# Altium PCB PCB1.PcbDoc
Units mil, origin at the board's own origin, x right, y up, seen from the top; angles counter-clockwise.
Board outline 2600 x 2600 mil, 2 copper layers (Top Layer, Bottom Layer); 21 components, 109 nets, 295 pads, 0 vias.
Unrouted connection lines stored in the file: 152.
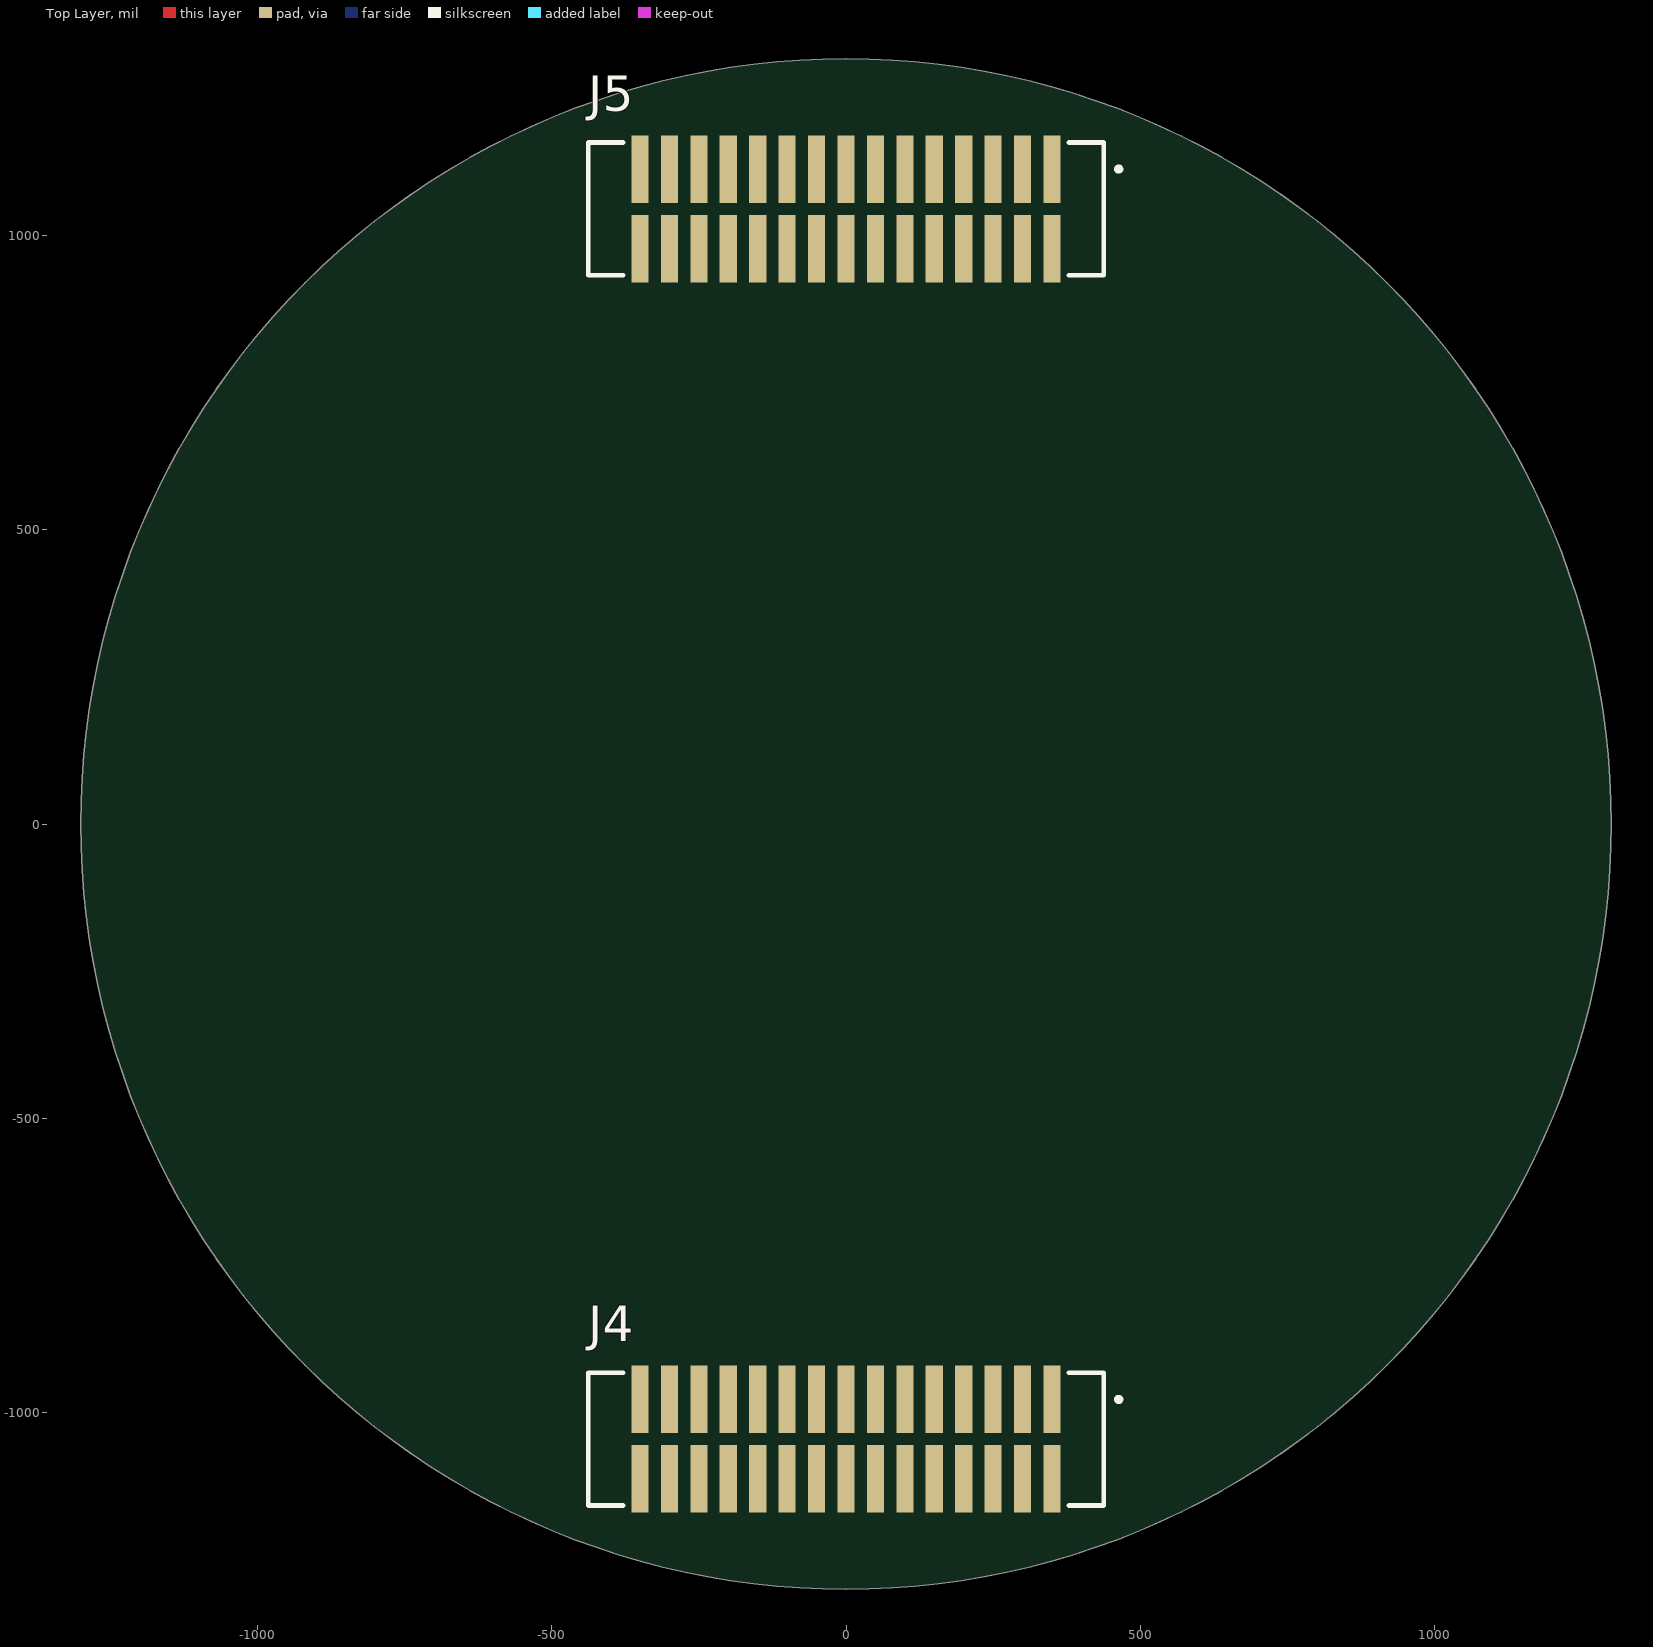
[diagram p0: Top Layer view]
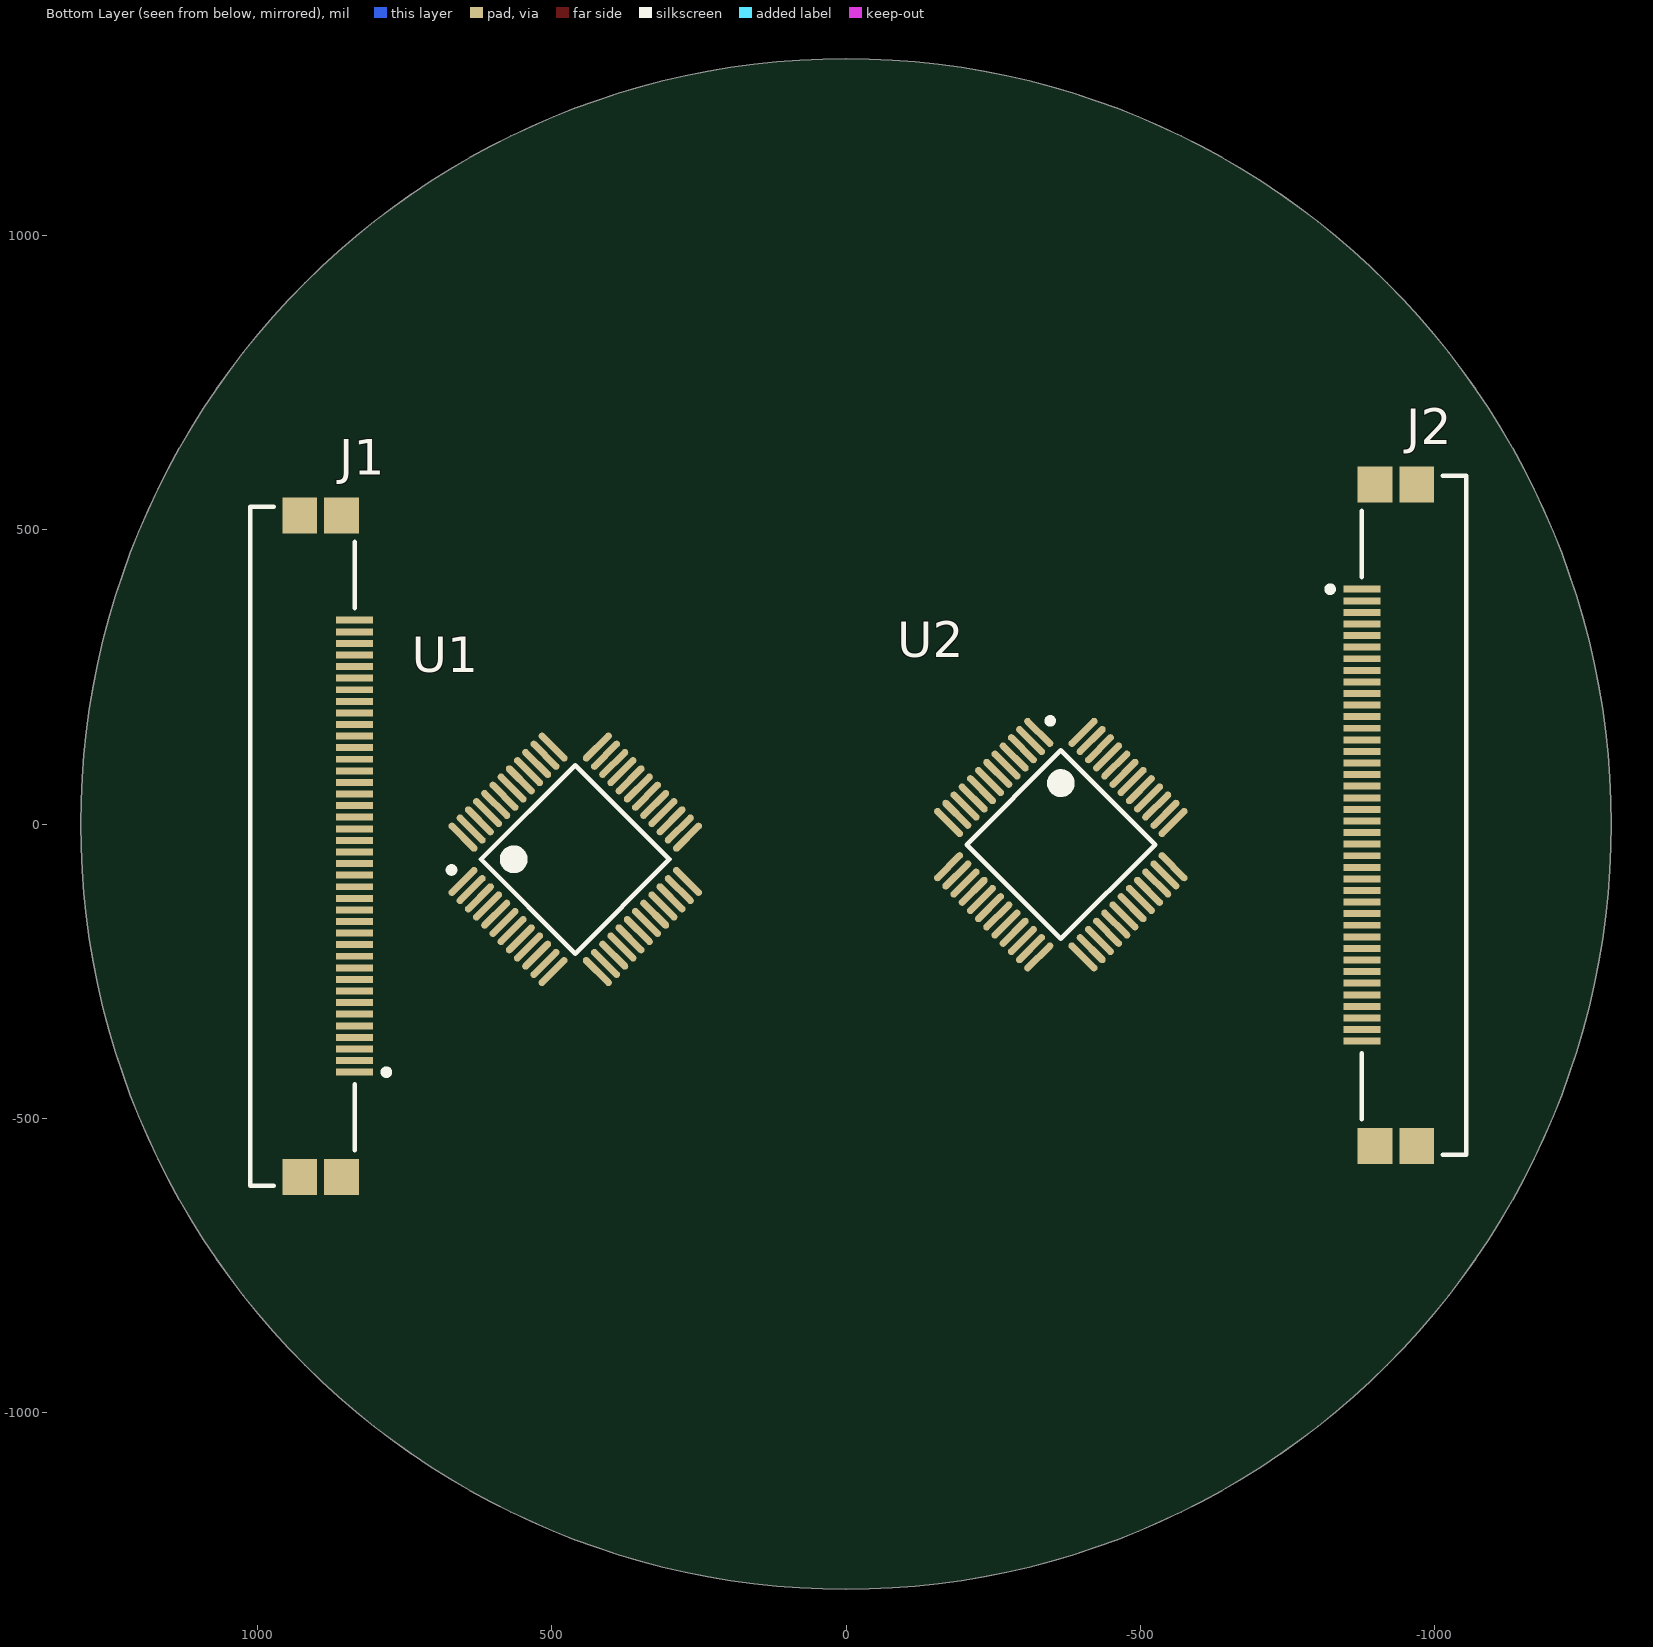
[diagram p1: Bottom Layer view, seen from below]

## Layer stack, top to bottom
Top Solder: solder mask 0.4, Solder Resist, Dk 3.5
Top Layer: signal copper 1.4
Dielectric 1: dielectric 12.6, FR-4, Dk 4.8
Bottom Layer: signal copper 1.4
Bottom Solder: solder mask 0.4, Solder Resist, Dk 3.5

## Board outline
-1300,0 ccw(c0,0) 0,-1300 ccw(c0,0) 1300,0 ccw(c0,0) 0,1300 ccw(c0,0)

## Design rules (kind name [scope] priority, off if disabled: settings)
Clearance [All] p1: gap=8 ignorepadtopadclearanceinfootprint=FALSE except(6: Arc-SMDPad Track-SMDPad SMDPad-SMDPad; 12: Arc-Via Track-Via)
HoleSize [All] p1: absolutevalues=TRUE maxlimit=100 minlimit=14 maxpercent=80.000 minpercent=20.000
PolygonConnect [All] p1: connectstyle=Relief reliefconductorwidth=10 reliefentries=4 polygonreliefangle="90 Angle" airgapwidth=10
RoutingVias [All] p1: holewidth=14 width=28 viastyle="Through Hole" minholewidth=14 minwidth=28 maxholewidth=14 maxwidth=28
SolderMaskExpansion [All] p1: expansion=4 istentingtop=FALSE
Width [All] p1: maxlimit=30 minlimit=10 preferedwidth=10
29 further rules are at their usual default settings.

## Components (designator, comment, footprint, x,y, rotation, side; value= is the part's Value field where it differs from the comment)
C1 "330nF" FP-CC0805-0_85-MFG 4445,5125 r0 top value="330 nF"
C2 "33nF" CAPC2013X95X45NL10T25 4260,5135 r0 top
C3 "3.3nF" FP-C0805C-DN-MFG 4085,5125 r0 top value="3,300 pF"
C4 "330pF" FP-C0805C-DN-MFG 3915,5125 r0 top value="330 pF"
C5 "100 nF" FP-C0805C-DN-MFG 3575,5125 r0 top value="0.10 μF"
C6 "100 nF" FP-C0805C-DN-MFG 3035,5125 r0 top value="0.10 μF"
C7 "100 nF" FP-C0805C-DN-MFG 2865,5125 r0 top value="0.10 μF"
J1 "200485-0540" FP-200485-0540-MFG 923.39,-37.68 r270 bottom
J2 "200485-0540" FP-200485-0540-MFG -965,15 r90 bottom
J3 "5600200620" FP-5600200620-MFG 4820,5010 r90 top
J4 "TFM-115-02-L-D" SAMTEC_TFM-115-02-L-D 0,-1045 r180 top
J5 "TFM-115-02-L-D" SAMTEC_TFM-115-02-L-D 0,1045 r180 top
P1 "61300311021" 61300311021 1735,5020 r0 top
P2 "61300211021" 61300211021 2065,5020 r0 top
P3 "61300211021" 61300211021 2345,5020 r0 top
R1 "100" RESC2013X50X30LL20T20 5535,5140 r0 top
R2 "1k" RESC2013X55X40LL15T20 3740,5140 r0 top
S1 "SSSS212400" SSSS212400 2670,4675 r90 top
U1 "ADG732BSUZ-REEL" ADI-SU-48_N 460,-60 r135 bottom
U2 "ADG732BSUZ-REEL" ADI-SU-48_N -365,-35 r225 bottom
U3 "OPA2388IDR" FP-D0008A-IPC_B 3315,5060 r0 top

## Footprints (in the part's own frame and the unit in brackets; to place one, negate y for a bottom-side part, rotate by r counter-clockwise, add the part's x,y. Pads: shape width x height; smd on the part's side, far side on the other; paste and mask are expansions set on the pad)
61300211021 [mm] "Pin Header, pitch 2.54 mm, THT, Angled, single row, 2p"
  rect 1.65x1.65 hole 1.1: 1(1.27,2.77)
  round 1.65 hole 1.1: 2(-1.27,2.77)
  silkscreen extent -2.69,-7.27 2.69,1.35, body extent -2.54,-7.27 2.54,3.09, height 2.58
61300311021 [mm] "Pin Header, pitch 2.54 mm, THT, Angled, single row, 3p"
  rect 1.65x1.65 hole 1.1: 1(2.54,2.77)
  round 1.65 hole 1.1: 2(0,2.77) 3(-2.54,2.77)
  silkscreen extent -3.96,-7.27 3.96,1.35, body extent -3.81,-7.27 3.81,3.09, height 2.58
ADI-SU-48_N [mm] "QFP, 48-Leads, Body 7x7mm, Pitch 0.5mm, IPC Medium Density"
  oval 1.65x0.3 smd: 1(-4.1,2.75) 2(-4.1,2.25) 3(-4.1,1.75) 4(-4.1,1.25) 5(-4.1,0.75) 6(-4.1,0.25) 7(-4.1,-0.25) 8(-4.1,-0.75) 9(-4.1,-1.25) 10(-4.1,-1.75) 11(-4.1,-2.25) 12(-4.1,-2.75) 25(4.1,-2.75) 26(4.1,-2.25) 27(4.1,-1.75) 28(4.1,-1.25) 29(4.1,-0.75) 30(4.1,-0.25) 31(4.1,0.25) 32(4.1,0.75) 33(4.1,1.25) 34(4.1,1.75) 35(4.1,2.25) 36(4.1,2.75)
  oval 0.3x1.65 smd: 13(-2.75,-4.1) 14(-2.25,-4.1) 15(-1.75,-4.1) 16(-1.25,-4.1) 17(-0.75,-4.1) 18(-0.25,-4.1) 19(0.25,-4.1) 20(0.75,-4.1) 21(1.25,-4.1) 22(1.75,-4.1) 23(2.25,-4.1) 24(2.75,-4.1) 37(2.75,4.1) 38(2.25,4.1) 39(1.75,4.1) 40(1.25,4.1) 41(0.75,4.1) 42(0.25,4.1) 43(-0.25,4.1) 44(-0.75,4.1) 45(-1.25,4.1) 46(-1.75,4.1) 47(-2.25,4.1) 48(-2.75,4.1)
  silkscreen extent -4.22,-2.88 2.88,3.57, body extent -3.5,-3.5 3.5,3.5, height 1.2
CAPC2013X95X45NL10T25 [mm] "Chip Capacitor, 2-Leads, Body 2.00x1.25mm, IPC Medium Density"
  rect 1.2x1.4 smd: 1(-0.85,0) 2(0.85,0)
  body extent -1.05,-0.67 1.05,0.67, height 0.95
FP-200485-0540-MFG [mm]
  rect 0.3x1.6 smd paste-1000 mask+0: 1(9.75,2.245) 2(9.25,2.245) 3(8.75,2.245) 4(8.25,2.245) 5(7.75,2.245) 6(7.25,2.245) 7(6.75,2.245) 8(6.25,2.245) 9(5.75,2.245) 10(5.25,2.245) 11(4.75,2.245) 12(4.25,2.245) 13(3.75,2.245) 14(3.25,2.245) 15(2.75,2.245) 16(2.25,2.245) 17(1.75,2.245) 18(1.25,2.245) 19(0.75,2.245) 20(0.25,2.245) 21(-0.25,2.245) 22(-0.75,2.245) 23(-1.25,2.245) 24(-1.75,2.245) 25(-2.25,2.245) 26(-2.75,2.245) 27(-3.25,2.245) 28(-3.75,2.245) 29(-4.25,2.245) 30(-4.75,2.245) 31(-5.25,2.245) 32(-5.75,2.245) 33(-6.25,2.245) 34(-6.75,2.245) 35(-7.25,2.245) 36(-7.75,2.245) 37(-8.25,2.245) 38(-8.75,2.245) 39(-9.25,2.245) 40(-9.75,2.245)
  rect 1.55x1.5 smd paste+0 mask+0: 41(-14.275,1.685) 42(14.275,1.685) 43(-14.275,-0.115) 44(14.275,-0.115)
  silkscreen extent -14.65,-2.25 14.65,3.74, body extent -14.75,-2.2 14.74,2.8, height 5.7
FP-5600200620-MFG [mm]
  rect 1.2x2.2 smd paste+0 mask+0: 1(5,4.68) 2(3,4.68) 3(1,4.68) 4(-1,4.68) 5(-3,4.68) 6(-5,4.68)
  rect 2x4.2 smd paste+0 mask+0: 7(-8.6,-0.9) 8(8.6,-0.9)
  silkscreen extent -9.43,-4 9.43,6.63, body extent -9.7,-4.1 9.7,5.88, height 0.25
FP-C0805C-DN-MFG [mm]
  rect 0.95x1.35 smd paste+0 mask+0: 1(-0.75,0) 2(0.75,0)
  silkscreen extent -1.1,-1.07 1.1,1.07, body extent -1.4,-0.85 1.4,0.85, height 0.25
FP-CC0805-0_85-MFG [mm]
  rect 0.95x1.4 smd paste+0 mask+0: 1(-0.925,0) 2(0.925,0)
  silkscreen extent -0.08,-0.72 0.08,0.72, body extent -1.6,-1.05 1.6,1.05, height 0.25
FP-D0008A-IPC_B [mil]
  rect 85.4x22.92 smd paste+0 mask+0: 1(-93.06,75)
  rrect100% 85.4x22.92 smd paste+0 mask+0: 2(-93.06,25) 3(-93.06,-25) 4(-93.06,-75) 5(93.06,-75) 6(93.06,-25) 7(93.06,25) 8(93.06,75)
  silkscreen extent -162,-97 31,97, body extent -146,-106 146,106, height 10
RESC2013X50X30LL20T20 [mm] "Chip Resistor, 2-Leads, Body 2.00x1.25mm, IPC High Density"
  rect 0.85x1.35 smd: 1(-0.825,0) 2(0.825,0)
  silkscreen extent -0.1,-0.58 0.1,0.58, body extent -1.1,-0.72 1.1,0.72, height 0.5
RESC2013X55X40LL15T20 [mm] "Chip Resistor, 2-Leads, Body 2.00x1.25mm, IPC High Density"
  rect 0.9x1.3 smd: 1(-0.775,0) 2(0.775,0)
  body extent -1.07,-0.7 1.07,0.7, height 0.55
SAMTEC_TFM-115-02-L-D [mm]
  rect 0.74x2.92 smd: 01(-8.89,-1.715) 02(-8.89,1.715) 03(-7.62,-1.715) 04(-7.62,1.715) 05(-6.35,-1.715) 06(-6.35,1.715) 07(-5.08,-1.715) 08(-5.08,1.715) 09(-3.81,-1.715) 10(-3.81,1.715) 11(-2.54,-1.715) 12(-2.54,1.715) 13(-1.27,-1.715) 14(-1.27,1.715) 15(0,-1.715) 16(0,1.715) 17(1.27,-1.715) 18(1.27,1.715) 19(2.54,-1.715) 20(2.54,1.715) 21(3.81,-1.715) 22(3.81,1.715) 23(5.08,-1.715) 24(5.08,1.715) 25(6.35,-1.715) 26(6.35,1.715) 27(7.62,-1.715) 28(7.62,1.715) 29(8.89,-1.715) 30(8.89,1.715)
  silkscreen extent -11.87,-2.86 11.11,2.86, body extent -11.11,-3.05 11.11,2.92, height 5.71
SSSS212400 [mm]
  round 1.4 hole 0.9: 1(0,0) 2(2,0) 3(6,0) 4(8,0) 5(10,0) 6(0,3.3) 7(2,3.3) 8(6,3.3) 9(8,3.3) 10(10,3.3)
  silkscreen extent -2.5,-2.1 12.5,3.4, body extent -2.5,-2.1 12.5,3.65, height 3.6

## Part data
C1: library part CMP-03422-000882-1, "Surface Mount Ceramic Multilayer Capacitor 0.33uF 10% X7R 16V 0805 Blister T/R", Capacitance="330 nF", Manufacturer=Yageo, Manufacturer Part Number=CC0805KKX7R7BB334, Package=CC0805-0.85, Temperature="-30°C to +85°C", Temperature Characteristic=X7R, Temperature Range High=+85°C, Temperature Range Low=-30°C, Tolerance=0.1, Voltage Rating="16 V", Automotive=No, Category=Cap, ComponentLink2Description=Datasheet, ComponentLink2URL=http://www.yageo.com/documents/recent/UPY-GPHC_Y5V_6.3V-to-50V_8.pdf, Device Class L1="Passive Components", Device Class L2=Capacitors, Device Class L3="Ceramic Capacitors", Digikey Description="Surface Mount Ceramic Multilayer Capacitor 0.33uF 10% X7R 16V 0805 Blister T/R", Footprint Url=http://www.yageo.com/exep/pages/download/literatures/UPY-C_GEN_24.pdf, Height=0.95mm, Ipc Land Pattern Name=CAPC200125X85, Lead Free=Yes, Material=Ceramic, Mouser Description="Multilayer Ceramic Capacitors MLCC - SMD/SMT 330nF 16V X7R 10%", Octopart=https://octopart.com/cc0805kkx7r7bb334-yageo-42334127, RoHS=TRUE
C2: library part CMP-1036-04169-2, Manufacturer=Murata, Part Number=GRM219R71H333KA01D
C3: library part CMP-2007-00373-2, "CAP CER 3300PF 50V X7R 0805", Capacitance="3,300 pF", Manufacturer=KEMET, Manufacturer Part Number=C0805C332K5RACTU, Package=C0805C-DN, Temperature="-55°C to +125°C", Temperature Characteristic=X7R, Temperature Coefficient=30ppm/°C, Temperature Range High=+125°C, Temperature Range Low=-55°C, Tolerance=0.1, Voltage Rating="50 V", Automotive=No, Category=Cap, ComponentLink2Description=Datasheet, ComponentLink2URL=https://content.kemet.com/datasheets/KEM_C1003_C0G_SMD.pdf, Device Class L1="Passive Components", Device Class L2=Capacitors, Device Class L3="Ceramic Capacitors", Digikey Description="CAP CER 3300PF 50V X7R 0805", Height=0.88mm, Ipc Land Pattern Name=CAPC200125X78, Lead Free=Yes, Material=Ceramic, Mouser Description="Multilayer Ceramic Capacitors MLCC - SMD/SMT 50volts 3300pF X7R 10%", Octopart=https://octopart.com/c0805c332k5ractu-kemet-90782, RoHS=TRUE
C4: library part CMP-2007-00598-2, "CAP CER 330PF 50V C0G/NP0 0805", Capacitance="330 pF", Manufacturer=KEMET, Manufacturer Part Number=C0805C331J5GACTU, Package=C0805C-DN, Temperature="-55°C to +125°C", Temperature Characteristic=C0G, Temperature Coefficient=30ppm/°C, Temperature Range High=+125°C, Temperature Range Low=-55°C, Tolerance=0.05, Voltage Rating="50 V", Automotive=No, Category=Cap, ComponentLink2Description=Datasheet, ComponentLink2URL=https://content.kemet.com/datasheets/KEM_C1003_C0G_SMD.pdf, Device Class L1="Passive Components", Device Class L2=Capacitors, Device Class L3="Ceramic Capacitors", Digikey Description="CAP CER 330PF 50V C0G/NP0 0805", Height=0.88mm, Ipc Land Pattern Name=CAPC200125X78, Lead Free=Yes, Material=Ceramic, Mouser Description="Ceramic Capacitor 330Pf 50V, C0G, 5%, 0805, Full Reel", Octopart=https://octopart.com/c0805c331j5gactu-kemet-85885, RoHS=TRUE
C5 C6 C7: library part CMP-2007-00279-2, "CAP CER 0.1UF 50V X7R 0805", Capacitance="0.10 μF", Manufacturer=KEMET, Manufacturer Part Number=C0805C104K5RACTU, Package=C0805C-DN, Temperature="-55°C to +125°C", Temperature Characteristic=X7R, Temperature Coefficient=30ppm/°C, Temperature Range High=+125°C, Temperature Range Low=-55°C, Tolerance=0.1, Voltage Rating="50 V", Automotive=No, Category=Cap, ComponentLink2Description=Datasheet, ComponentLink2URL=https://content.kemet.com/datasheets/KEM_C1003_C0G_SMD.pdf, Device Class L1="Passive Components", Device Class L2=Capacitors, Device Class L3="Ceramic Capacitors", Digikey Description="CAP CER 0.1UF 50V X7R 0805", Height=0.88mm, Ipc Land Pattern Name=CAPC200125X78, Lead Free=Yes, Material=Ceramic, Mouser Description="Cap Ceramic 0.1uF 50V X7R 10% SMD 2.0 x 1.2 mm 125 C Paper T/R", Octopart=https://octopart.com/c0805c104k5ractu-kemet-143926, RoHS=TRUE
J1 J2: library part CMP-04775-000016-1, "0.5ONE-TOUCH ST 40P"
J3: library part CMP-04776-000066-1, "CONN HEADER SMD 6POS 2MM", Current Rating=3A, Manufacturer=Molex, Temperature="-40°C to +125°C", Temperature Range High=+125°C, Temperature Range Low=-40°C, Voltage Rating=125V, Automotive=No, Category=Conn, ComponentLink2Description=Datasheet, ComponentLink2URL=https://www.molex.com/webdocs/datasheets/pdf/en-us/5600200320_PCB_HEADERS.pdf, Conn Gender=Male, Conn Orientation=Vertical, Contact Material=Tin,Nickel, Device Class L1=Connectors, Device Class L2="Headers and Wire Housings", Device Class L3=unset, Digikey Description="CONN HEADER SMD 6POS 2MM", Footprint Url=https://www.molex.com/pdm_docs/sd/5600200320_sd.pdf, Height=8.2mm, Lead Free=Yes, Manufacturer Part Number=5600200620, Number of Contacts=6, Number of Rows=1, Octopart=https://octopart.com/5600200620-molex-51767481, Package=5600200620, Pitch=2mm, RoHS=TRUE
J4 J5: Package=None, Availability=Unavailable, MF="Samtec Inc.", MP=TFM-115-02-L-D, Price=None, System=Connector
P1: library part CMP-1502-01061-1, "THT Angled Pin Header WR-PHD, Pitch 2.54 mm, Single Row, 3 pins", Contact Resistance=20mOhm, Manufacturer="Wurth Elektronik", Operating Temperature=-40to105degC, Rated Current=3A, Withstanding Voltage=500VAC, Working Voltage=250VAC, Datasheet URL=https://katalog.we-online.de/em/datasheet/6130xx11021.pdf, Gender=Male, Manufacturer URL=http://www.we-online.de, Mounting Technology=THT, Orientation=Angled, Package Reference=61300311021, Packaging=Bag, Part Number=61300311021, Pin Number=3, Pitch=2.54mm, Publisher=WurthElektronik, Row Number=Single
P2 P3: library part CMP-1502-01059-1, "THT Angled Pin Header WR-PHD, Pitch 2.54 mm, Single Row, 2 pins", Contact Resistance=20mOhm, Manufacturer="Wurth Elektronik", Operating Temperature=-40to105degC, Rated Current=3A, Withstanding Voltage=500VAC, Working Voltage=250VAC, Datasheet URL=https://katalog.we-online.de/em/datasheet/6130xx11021.pdf, Gender=Male, Manufacturer URL=http://www.we-online.de, Mounting Technology=THT, Orientation=Angled, Package Reference=61300211021, Packaging=Bag, Part Number=61300211021, Pin Number=2, Pitch=2.54mm, Publisher=WurthElektronik, Row Number=Single
R1: library part CMP-2001-04901-1, Manufacturer="Vishay Dale", Part Number=CRCW0805100RFKEA
R2: library part CMP-2001-04738-1, "TNPW08051K00BEEN", Manufacturer="Vishay Dale", Part Number=TNPW08051K00BEEN
S1: "Switch", Manufacturer_Name="ALPS Electric", Mouser Part Number=688-SSSS212400, Datasheet Link=https://www.alps.com/prod/info/E/HTML/Switch/Slide/SSSS2/SSSS224100.html, Height=3.5mm, Manufacturer_Part_Number=SSSS212400, Mouser Price/Stock=https://www.mouser.com/Search/Refine.aspx?Keyword=688-SSSS212400
U1 U2: library part CMP-0798-00236-1, "1.8 to 5.5 V / +/-2.5 V, 4 Ohm, 32-Channel Analog Multiplexer, -40 to 85 degC, 48-pin QFP (SU-48), Reel", Manufacturer="Analog Devices", Bandwidth (Hz)=18M, Code_JEDEC=MS-026ABC, ComponentLink1Description="Manufacturer URL", ComponentLink1URL=http://www.analog.com/en/index.html, ComponentLink2Description=Datasheet, ComponentLink2URL=http://www.analog.com/static/imported-files/data_sheets/ADG726_732.pdf, ComponentLink3Description="Package Specification", ComponentLink3URL=http://www.analog.com/static/imported-files/packages/470644706845302410119987SU48_7x7.pdf, DatasheetVersion="Rev. 0", Max Analog Signal Range="Vss to Vdd", Mounting Technology="Surface Mount", PackageDescription="48-Pin Thin Plastic Quad Flat Package, Body 7 x 7 mm, Pitch 0.5 mm", PackageReference=SU-48, Packing=Reel, PartNumber=ADG732BSUZ-REEL, Ron (ohms)=4, Supply V Guar Performance="Dual_(+/-2.5V), Single_(+3V), Single_(+5V)", t transition (s)=23n
U3: library part CMP-04895-000483-1, "IC OPAMP ZER-DRIFT 2CIRC 8SOIC", Max Operating Temperature=125°C, Min Operating Temperature=-40°C, Number of Channels=2, RoHS Compliant=Yes

## Nets (pads, with @x,y where several pads share a name; then routed paths per layer and width w, separated by ;. In a path a pad name is that pad's centre, name@x,y a point inside that pad or via, vN(x,y) a via of type N, cw(c..) or ccw(c..) an arc to the next point about the centre after c; other vN are vias at no path point)
1V_REF: J5.05 U3.3
2V_REF: J5.06
3.3V: C5.2 U3.8
3V3: C6.1 C7.1 J3.1 J5.03 J5.04 U1.13 U1.14 U2.13 U2.14
5KHZ_POLE: C2.2 S1.9
50KHZ_POLE: C3.2 S1.7
500HZ_POLE: C1.2 S1.10
500KHZ_POLE: C4.1 S1.6
!ADC_CS: J5.21
!BME_CS: J3.6 J5.29
!CHIP_EN: J4.19 U1.22 U2.22
!DAC_CS: J5.23
!GATE_SHDN: J5.28
+11V: J4.13
-11V: J4.14
DRAIN_SEL0: J4.22 U1.15
DRAIN_SEL1: J5.17 U1.16
DRAIN_SEL2: J4.24 U1.17
DRAIN_SEL3: J5.15 U1.18
DRAIN_SEL4: J5.18 U1.19
GATE1: J1.1 J4.04 P1.1
GATE2: J1.2 J4.06 P1.2
GATE3: J1.3 J4.03 P1.3
GATE4: J4.05
GATE5: J4.10
GATE6: J4.09
GATE_AMP: J4.21
GND: C5.1 C6.2 C7.2 J3.2 J4.01 J4.02 J4.07 J4.08 J4.11 J4.12 J4.15 J4.16 J4.20 J4.23 J4.28 J5.01 J5.02 J5.07 J5.08 J5.11 J5.13 J5.14 J5.16 J5.19 J5.24 J5.27 U1.20 U1.21 U1.23 U1.24 U2.20 U2.21 U2.23 U2.24 U3.4
GPIO13: J4.18
HEAT_THERM_BUFF: J4.25
IDS: C1.1 C2.1 C3.1 C4.2 R2.1 U2.43 U3.2
IDS1: J2.4 P2.1 U2.12
IDS2: J2.5 U2.11
IDS3: J2.6 U2.10
IDS4: J2.7 U2.9
IDS5: J2.8 U2.8
IDS6: J2.9 U2.7
IDS7: J2.10 U2.6
IDS8: J2.11 U2.5
IDS9: J2.12 U2.4
IDS10: J2.13 U2.3
IDS11: J2.14 U2.2
IDS12: J2.15 U2.1
IDS13: J2.16 U2.48
IDS14: J2.17 U2.47
IDS15: J2.18 U2.46
IDS16: J2.19 U2.45
IDS17: J2.35 U2.25
IDS18: J2.34 U2.26
IDS19: J2.33 U2.27
IDS20: J2.32 U2.28
IDS21: J2.31 U2.29
IDS22: J2.30 U2.30
IDS23: J2.29 U2.31
IDS24: J2.28 U2.32
IDS25: J2.27 U2.33
IDS26: J2.26 U2.34
IDS27: J2.25 U2.35
IDS28: J2.24 U2.36
IDS29: J2.23 U2.37
IDS30: J2.22 U2.38
IDS31: J2.21 U2.39
IDS32: J2.20 P2.2 U2.40
LOW_BATT: J4.29
MISO: J5.22 R1.2
MOSI: J3.5 J5.30
NetJ3_4: J3.4 R1.1
SCAN: J4.27
SCK: J3.3 J5.20
SOURCE_SEL0: J5.26 U2.15
SOURCE_SEL1: J5.25 U2.16
SOURCE_SEL2: J4.17 U2.17
SOURCE_SEL3: J4.30 U2.18
SOURCE_SEL4: J4.26 U2.19
VDS1: J1.4 P3.1 U1.12
VDS2: J1.5 U1.11
VDS3: J1.6 U1.10
VDS4: J1.7 U1.9
VDS5: J1.8 U1.8
VDS6: J1.9 U1.7
VDS7: J1.10 U1.6
VDS8: J1.11 U1.5
VDS9: J1.12 U1.4
VDS10: J1.13 U1.3
VDS11: J1.14 U1.2
VDS12: J1.15 U1.1
VDS13: J1.16 U1.48
VDS14: J1.17 U1.47
VDS15: J1.18 U1.46
VDS16: J1.19 U1.45
VDS17: J1.35 U1.25
VDS18: J1.34 U1.26
VDS19: J1.33 U1.27
VDS20: J1.32 U1.28
VDS21: J1.31 U1.29
VDS22: J1.30 U1.30
VDS23: J1.29 U1.31
VDS24: J1.28 U1.32
VDS25: J1.27 U1.33
VDS26: J1.26 U1.34
VDS27: J1.25 U1.35
VDS28: J1.24 U1.36
VDS29: J1.23 U1.37
VDS30: J1.22 U1.38
VDS31: J1.21 U1.39
VDS32: J1.20 P3.2 U1.40
VDS_BUFF: J5.09 U1.43 U3.6 U3.7
VDS_RAW: J5.10 U3.5
VMEAS: J5.12 R2.2 S1.8 U3.1
pads on no net: J1.36 J1.37 J1.38 J1.39 J1.40 J1.41 J1.42 J1.43 J1.44 J2.1 J2.2 J2.3 J2.36 J2.37 J2.38 J2.39 J2.40 J2.41 J2.42 J2.43 J2.44 J3.7 J3.8 S1.1 S1.2 S1.3 S1.4 S1.5 U1.41 U1.42 U1.44 U2.41 U2.42 U2.44

## Silkscreen, mask and mechanical layers (free items; w line width, h text height)
Mechanical 1:
  circle w5: c0,0 r1300